# Altium PCB Copy of HumFlex2_1.PcbDoc
Units mm, origin at the board's own origin, x right, y up, seen from the top; angles counter-clockwise.
Board outline 87.02 x 100.02 mm, 2 copper layers (Top Layer, Bottom Layer), stack 0.187 mm thick; 35 components, 18 nets, 191 pads, 848 vias.
Unrouted connection lines stored in the file: 2.
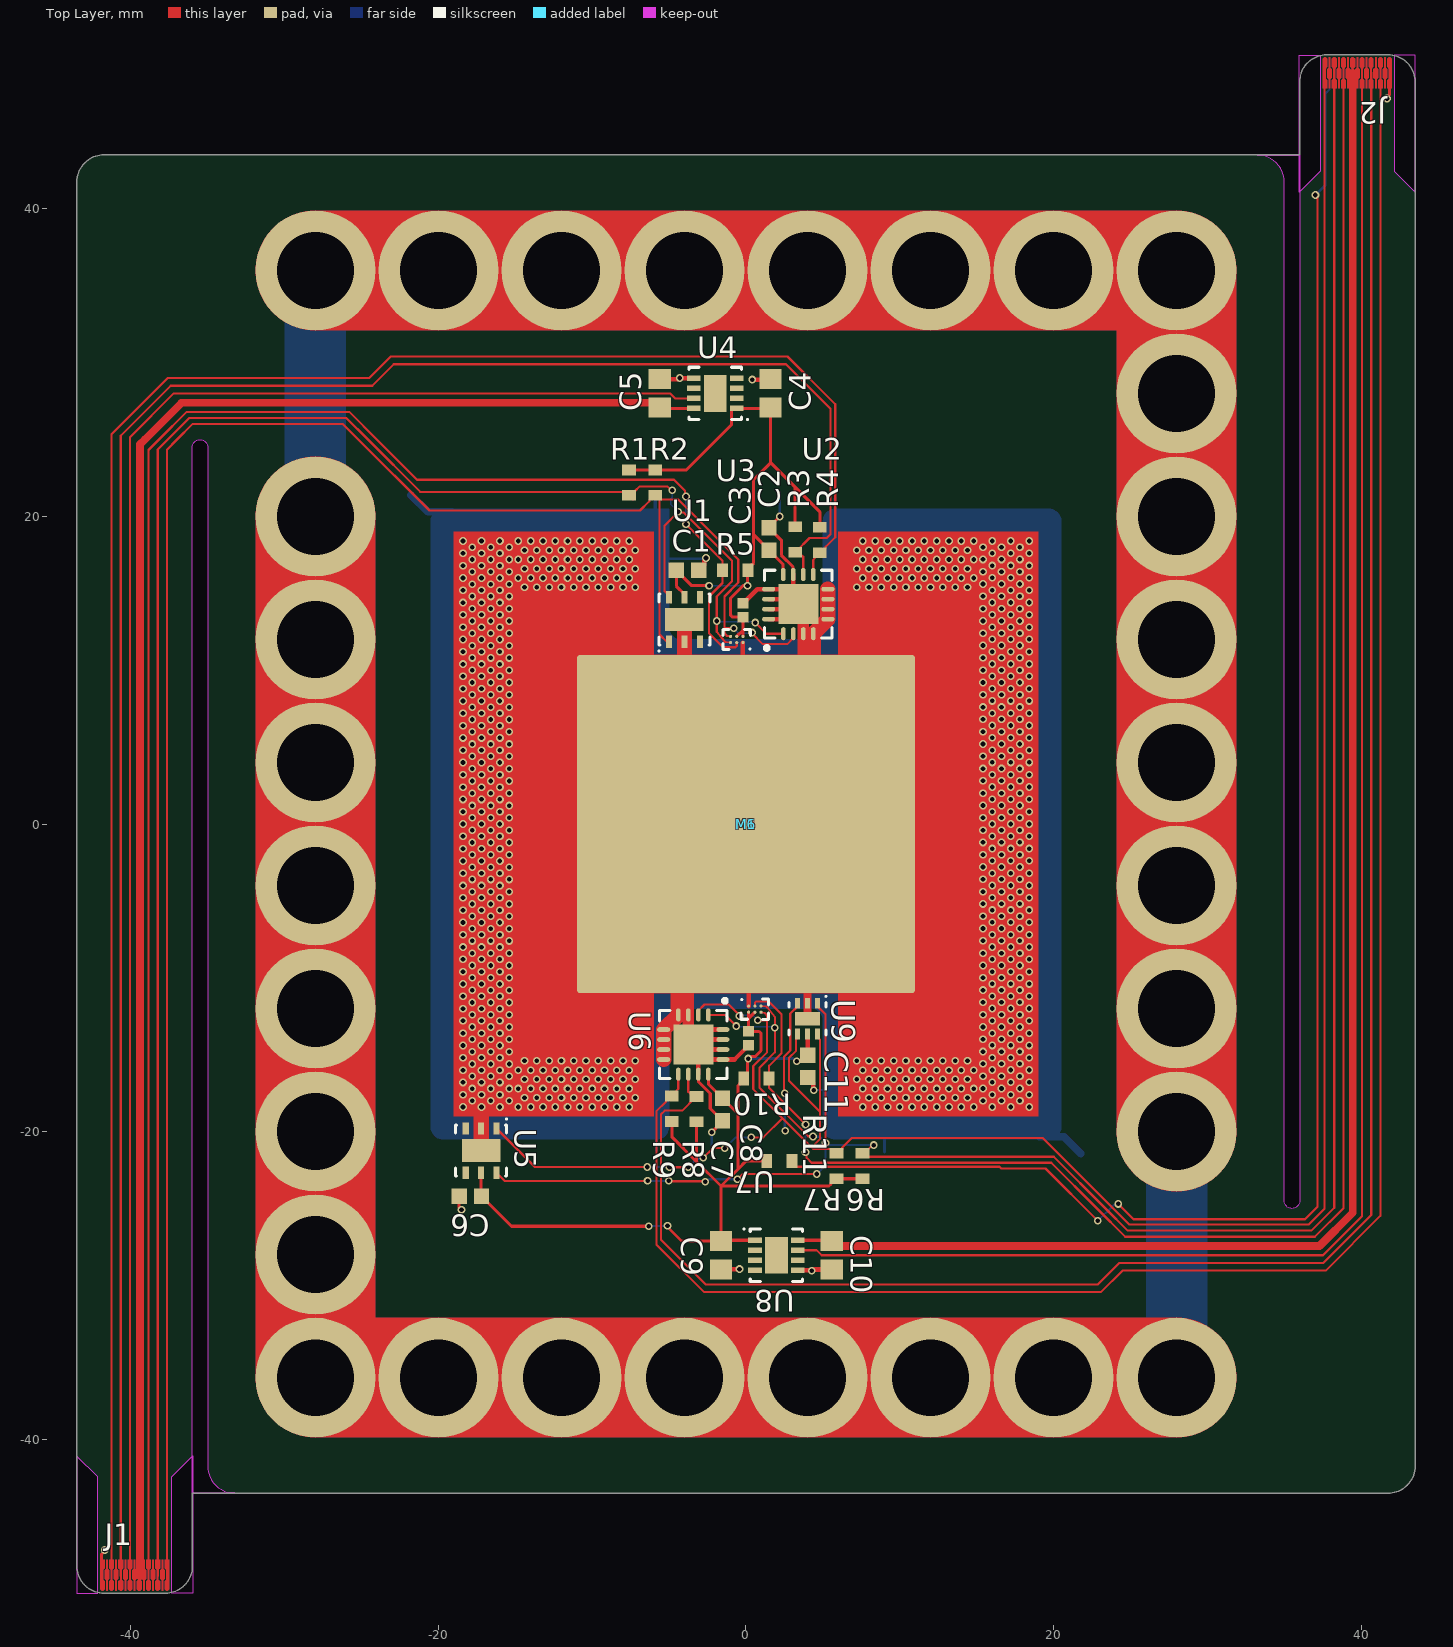
[diagram p0: Top Layer view]
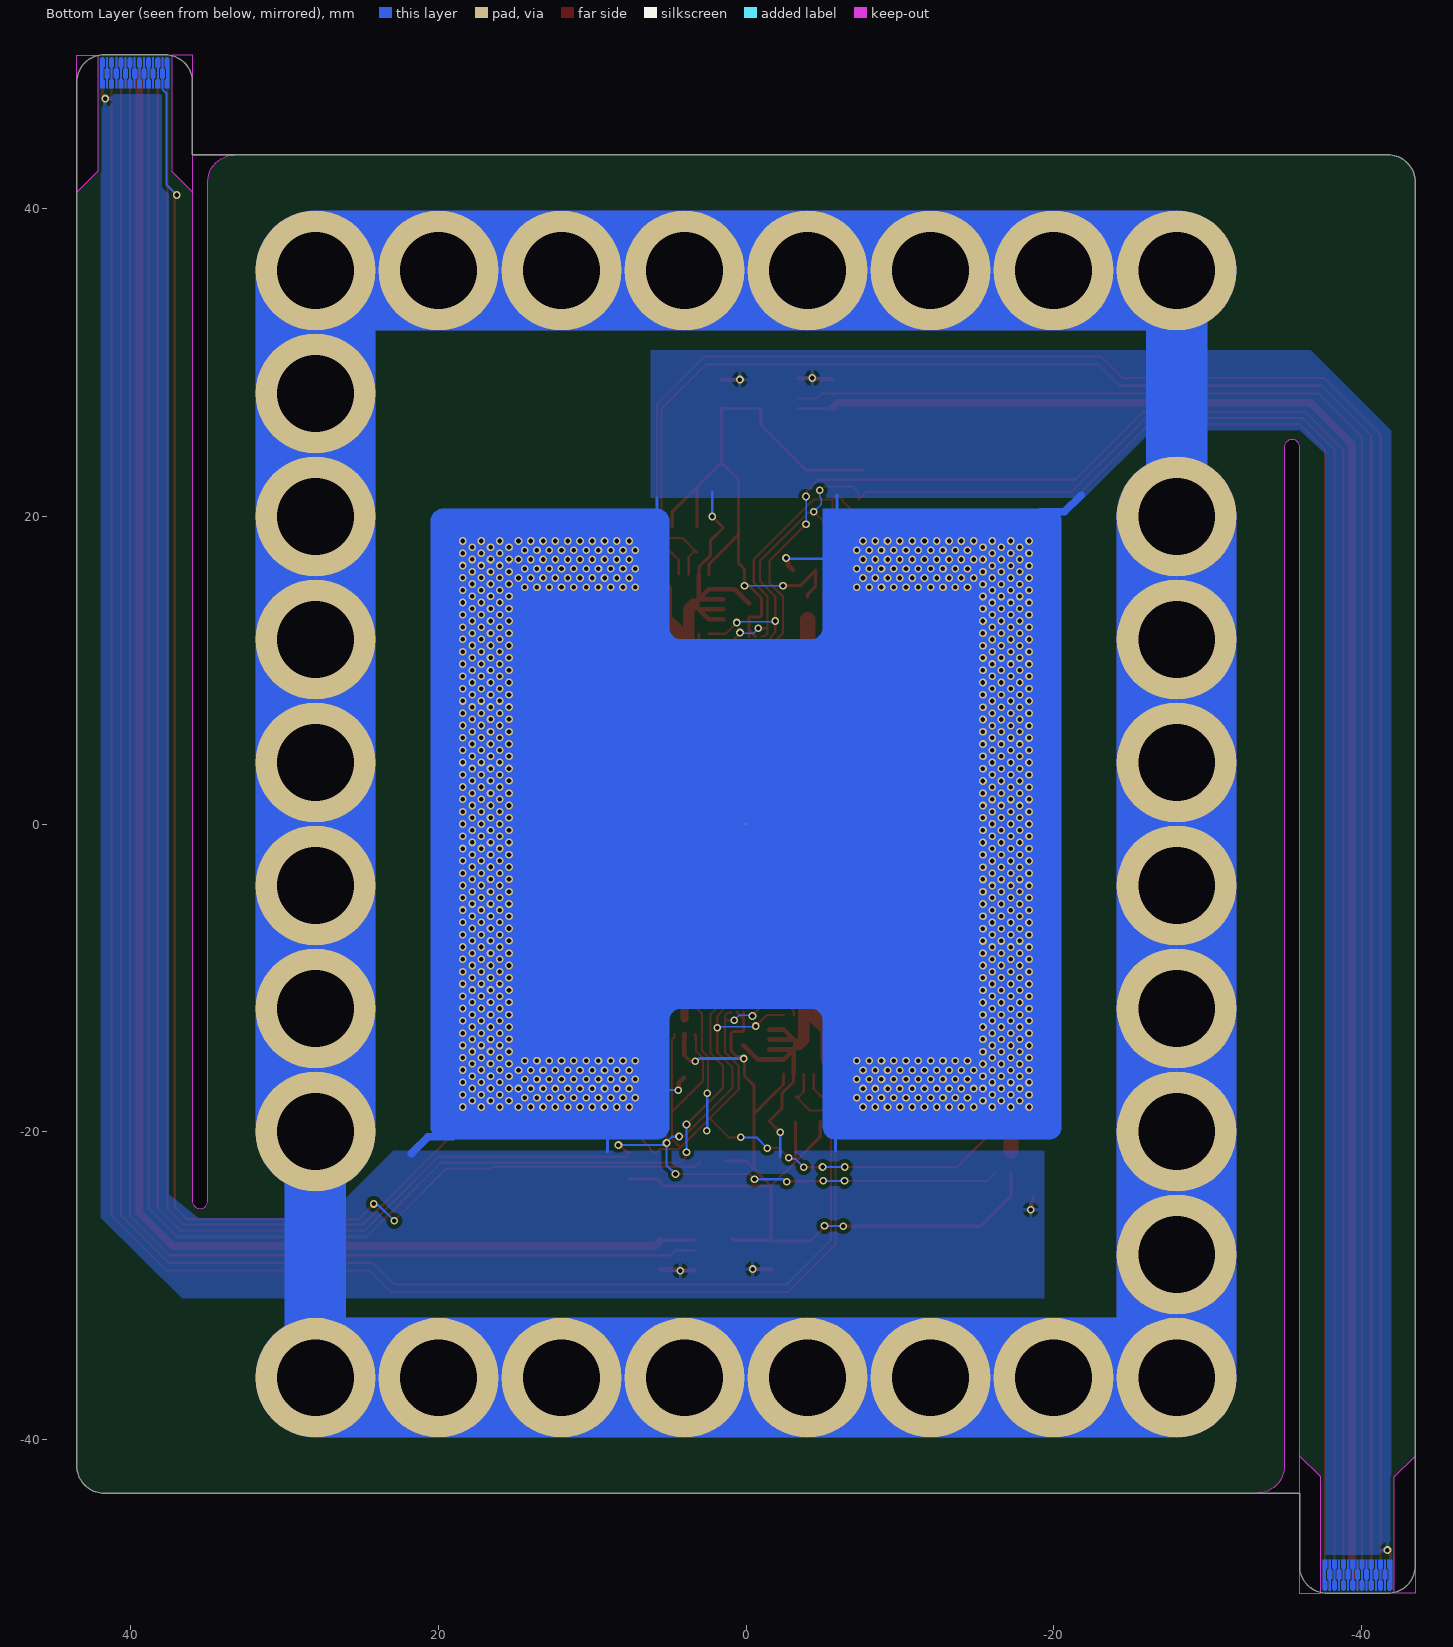
[diagram p1: Bottom Layer view, seen from below]

## Layer stack, top to bottom
Stiffener 1: core 0.1016, Core-009, Dk 4.5
Board Layer Stack Top Coverlay: solder mask 0.012, FC-001, Dk 4
Top Layer: signal copper 0.0175
Dielectric 1: core 0.0508, Core-001, Dk 4.1
Bottom Layer: signal copper 0.0175
Board Layer Stack Bottom Coverlay: solder mask 0.012, FC-001, Dk 4

## Board outline
42.996,-42.985 ccw(c41.753,-41.742) 43.511,-41.742 43.511,-24.994 43.511,48.253 ccw(c41.753,48.253) 41.753,50.011 37.758,50.011 ccw(c37.758,48.253) 36,48.253 36,43.511 -41.742,43.511 ccw(c-41.742,41.753) -42.991,42.99 ccw(c-41.747,41.747) -43.505,41.747 -43.505,25 -43.505,-48.247 ccw(c-41.747,-48.247) -41.747,-50.005 -37.753,-50.005 ccw(c-37.753,-48.247) -36.504,-49.485 ccw(c-37.747,-48.242) -35.989,-48.242 -35.989,-43.505 41.747,-43.505 ccw(c41.747,-41.747)
cut-out: -36,-43.5 -36,24.5 cw(c-35.5,24.5) -35.5,25 cw(c-35.5,24.5) -35,24.5 -35,-41.75 ccw(c-33.25,-41.75) -33.25,-43.5
cut-out: 35,-24.5 35,28 35,41.75 ccw(c33.25,41.75) 33.25,43.5 36,43.5 36,-24.5 cw(c35.5,-24.5) 35.5,-25 cw(c35.5,-24.5)
cut-out: 35.975,50 37.35,50 37.35,42.45 35.975,41.075
cut-out: 43.525,50 42.15,50 42.15,42.45 43.525,41.075
cut-out: -35.975,-50 -37.35,-50 -37.35,-42.45 -35.975,-41.075
cut-out: -43.5,-50 -42.15,-50 -42.15,-42.45 -43.5,-41.1
board region "Default Layer Stack Region": -43.5,-48.242 -43.5,-48.415 -43.432,-48.755 -43.3,-49.075 -43.108,-49.363 -42.863,-49.608 -42.575,-49.8 -42.255,-49.932 -41.915,-50 -41.742,-50 -37.747,-50 -37.574,-50 -37.234,-49.932 -36.915,-49.8 -36.627,-49.608 -36.382,-49.363 -36.189,-49.075 -36.057,-48.755 -35.989,-48.415 -35.989,-48.242 -35.989,-43.5 41.753,-43.5 41.926,-43.5 42.266,-43.432 42.585,-43.3 42.873,-43.108 43.118,-42.863 43.311,-42.575 43.443,-42.255 43.511,-41.915 43.511,-41.742 43.511,-24.994 43.511,48.253 43.511,48.426 43.443,48.766 43.311,49.085 43.118,49.373 42.873,49.618 42.585,49.811 42.266,49.943 41.926,50.011 41.753,50.011 37.758,50.011 37.585,50.011 37.245,49.943 36.925,49.811 36.637,49.618 36.392,49.373 36.2,49.085 36.068,48.766 36,48.426 36,48.253 36,43.511 -41.742,43.511 -41.912,43.511 -42.245,43.446 -42.559,43.319 -42.843,43.133 -43.087,42.897 -43.281,42.619 -43.418,42.309 -43.494,41.978 -43.499,41.808 -43.5,41.753 -43.5,25.006 -43.5,25.005
board region "Layer Stack Region 3": 41.747,-43.505 41.922,-43.505 42.263,-43.437 42.585,-43.303 42.874,-43.109 42.996,-42.985 42.868,-43.101 42.582,-43.292 42.263,-43.424 41.925,-43.492 41.753,-43.5 -35.989,-43.5 -35.989,-43.505
board region "Layer Stack Region 2": -43.5,24.995 -43.5,25.006 -43.5,41.753 -43.499,41.808 -43.486,41.972 -43.415,42.293 -43.285,42.595 -43.101,42.867 -42.991,42.99 -43.114,42.867 -43.306,42.579 -43.438,42.26 -43.505,41.92 -43.505,41.747 -43.505,25
board region "Layer Stack Region 5": -37.753,-50.005 -37.578,-50.005 -37.237,-49.937 -36.915,-49.803 -36.626,-49.609 -36.504,-49.485 -36.632,-49.601 -36.918,-49.792 -37.237,-49.924 -37.575,-49.992 -37.747,-50 -41.742,-50 -41.914,-49.992 -42.252,-49.924 -42.571,-49.792 -42.857,-49.601 -43.101,-49.357 -43.292,-49.071 -43.424,-48.752 -43.492,-48.414 -43.5,-48.242 -43.5,24.995 -43.505,25 -43.505,-48.247 -43.505,-48.421 -43.438,-48.76 -43.305,-49.08 -43.113,-49.368 -42.868,-49.613 -42.58,-49.805 -42.26,-49.938 -41.921,-50.005 -41.747,-50.005

## Design rules (kind name [scope] priority, off if disabled: settings)
Clearance [All] p1: gap=0.08 ignorepadtopadclearanceinfootprint=FALSE
ComponentClearance ComponentClearance_1 [InComponent('M6')] p1: gap=0 collisioncheckmode=3 verticalgap=0 showdistances=FALSE donotcheckwithout3dbody=TRUE
ComponentClearance ComponentClearance_2 [InComponent('M1')] p2: gap=0 collisioncheckmode=3 verticalgap=0 showdistances=FALSE donotcheckwithout3dbody=TRUE
ComponentClearance [All] p3: gap=0.254 collisioncheckmode=3 verticalgap=0.254 showdistances=FALSE
HoleSize [All] p1: absolutevalues=TRUE maxlimit=6 minlimit=0.2 maxpercent=80.000 minpercent=20.000
HoleToHoleClearance [All] p1: gap=0.3 allowstackedmicrovias=TRUE
MinimumAnnularRing [All] p1: minimumring=0.1
MinimumSolderMaskSliver [HasFootprint('PeltierElement')] p1: minsoldermaskwidth=0
MinimumSolderMaskSliver MinimumSolderMaskSliver_1 [All] p2: minsoldermaskwidth=0
PolygonConnect [All] p1: connectstyle=Relief reliefconductorwidth=0.254 reliefentries=4 polygonreliefangle="90 Angle" airgapwidth=0.254
RoutingVias [All] p1: holewidth=0.711 width=1.27 viastyle="Through Hole" minholewidth=0.711 minwidth=1.27 maxholewidth=0.711 maxwidth=1.27
SilkToSilkClearance [All] p1: silktosilkclearance=0.15
SilkToSolderMaskClearance [IsPad] p1: minsilkscreentomaskgap=0.15 clearancetoexposedcopper=TRUE
SolderMaskExpansion [All] p1: expansion=0.1 istentingtop=FALSE
Width [All] p1: maxlimit=8 minlimit=0.08 preferedwidth=0.2
24 further rules are at their usual default settings.

## Classes and differential pairs
component class HumFlex2_upper: C1 C2 C3 C4 C5 J1 R1 R2 R3 R4 R5 U1 U2 U3 U4
component class HumFlex2_mech: M1 M6
component class HumFlex2_lower: C6 C7 C8 C9 C10 C11 J2 R6 R7 R8 R9 R10 R11 U5 U6 U7 U8 U9

## Components (designator, comment, footprint, x,y, rotation, side; value= is the part's Value field where it differs from the comment)
C1 "100nF" CAP_SM0603_YAGEOCC2_N -3.8,16.5 r180 top
C2 "100nF" CAP_SM0603_YAGEOCC2_N 1.5,18.527 r270 top
C3 "10nF" CAP_SM0402_YAGEOCC2_N -0.2,13.9 r90 top
C4 "1uF" CAP_SM0805_YAGEOCC2_N 1.6,28 r270 top
C5 "1uF" CAP_SM0805_YAGEOCC2_N -5.6,28 r270 top
C6 "100nF" CAP_SM0603_YAGEOCC2_N -17.927,-24.2 r0 top
C7 "100nF" CAP_SM0603_YAGEOCC2_N -1.525,-18.564 r90 top
C8 "10nF" CAP_SM0402_YAGEOCC2_N 0.175,-13.937 r270 top
C9 "1uF" CAP_SM0805_YAGEOCC2_N -1.625,-28.037 r90 top
C10 "1uF" CAP_SM0805_YAGEOCC2_N 5.575,-28.037 r90 top
C11 "100nF" CAP_SM0603_YAGEOCC2_N 4.025,-15.75 r90 top
J1 "Dual Row 15Pos Connector" AYF331535_FPC -37.65,-49.85 r180 top
J2 "Dual Row 15Pos Connector" AYF331535_FPC 37.65,49.85 r0 top
M1 "Peltier Element" PeltierElement2 0,0 r90 top locked
M6 "Lego_Mount" Lego_Mount 0,0 r0 top
R1 "10K" RES_SM0603_YAGEORC_N -7.6,22.2 r90 top
R2 "10K" RES_SM0603_YAGEORC_N -5.9,22.2 r90 top
R3 "10K" RES_SM0603_YAGEORC_N 3.2,18.5 r90 top
R4 "10K" RES_SM0603_YAGEORC_N 4.8,18.473 r90 top
R5 "10K" RES_SM0603_YAGEORC_N -0.7,16.5 r0 top
R6 "10K" RES_SM0603_YAGEORC_N 7.575,-22.237 r270 top
R7 "10K" RES_SM0603_YAGEORC_N 5.875,-22.237 r270 top
R8 "10K" RES_SM0603_YAGEORC_N -3.225,-18.537 r270 top
R9 "10K" RES_SM0603_YAGEORC_N -4.825,-18.51 r270 top
R10 "10K" RES_SM0603_YAGEORC_N 0.675,-16.537 r180 top
R11 "10K" RES_SM0603_YAGEORC_N 2.173,-21.9 r180 top
U1 "SI7051-A20-IMR" SI7050/1/2/3/4/5 -4,13.3 r90 top
U2 "ADT7422CCPZ-RL7" ADT7422_QFN 3.4,14.3 r90 top
U3 "AS6221" AS6221_BGA -0.6,12 r180 top
U4 "TPS78433" TPS784xxxQDRBRQ1_SON -2,28 r180 top
U5 "SI7051-A20-IMR" SI7050/1/2/3/4/5 -17.225,-21.235 r270 top
U6 "ADT7422CCPZ-RL7" ADT7422_QFN -3.425,-14.337 r270 top
U7 "AS6221" AS6221_BGA 0.575,-12.037 r0 top
U8 "TPS78433" TPS784xxxQDRBRQ1_SON 1.975,-28.037 r0 top
U9 "TMP117" TMP117(N/M)AIDRV_WSON 4,-12.65 r270 top

## Footprints (in the part's own frame and the unit in brackets; to place one, negate y for a bottom-side part, rotate by r counter-clockwise, add the part's x,y. Pads: shape width x height; smd on the part's side, far side on the other; paste and mask are expansions set on the pad)
ADT7422_QFN [mm] "QFN, 16-Leads, Body 4,00x4,00mm, Pitch 0,65mm, Thermal Pad 2,60x2,60mm, IPC Medium Density"
  oval 0.85x0.3 smd: 1(-1.925,0.975) 2(-1.925,0.325) 3(-1.925,-0.325) 4(-1.925,-0.975) 9(1.925,-0.975) 10(1.925,-0.325) 11(1.925,0.325) 12(1.925,0.975)
  oval 0.3x0.85 smd: 5(-0.975,-1.925) 6(-0.325,-1.925) 7(0.325,-1.925) 8(0.975,-1.925) 13(0.975,1.925) 14(0.325,1.925) 15(-0.325,1.925) 16(-0.975,1.925)
  rect 2.6x2.6 smd: 17(0,0)
  silkscreen extent -2.97,-2.2 2.2,2.2, body extent -2.05,-2.05 2.05,2.05, height 0.8
AS6221_BGA [mm] "BGA, 6-Leads, Body 1,02x1,50mmx0,53mm, Pitch 0,40mm"
  round 0.2 smd: A1(-0.4,0.2) A2(0,0.2) A3(0.4,0.2) B1(-0.4,-0.2) B2(0,-0.2) B3(0.4,-0.2)
  silkscreen extent -0.9,-0.66 0.89,0.66, body extent -0.74,-0.51 0.74,0.51, height 0.55
AYF331535_FPC [mil]
  round 1 all layers, no hole paste-99999 mask+3.94: 1(0,-39.37) 2(11.81,-39.37)
  round 1 all layers, no hole paste-99999: 3(23.62,-39.37) 4(35.43,-39.37) 5(47.24,-39.37) 6(59.06,-39.37) 7(70.87,-39.37) 8(82.68,-39.37) 9(94.49,-39.37) 10(106.3,-39.37) 11(118.11,-39.37) 12(129.92,-39.37) 13(141.73,-39.37) 14(153.54,-39.37) 15(165.35,-39.37)
  Top Layer region: -5.91,-78.74 -5.91,-3.94 -1.97,0 -1.97,0 1.97,0 5.91,-3.94 5.91,-24.61 1.97,-28.54 1.97,-54.13 5.91,-58.07 5.91,-78.74
  Top Layer region: 5.91,-52.17 5.91,-30.51 9.84,-26.57 9.84,0 13.78,0 13.78,-26.57 17.72,-30.51 17.72,-52.17 13.78,-56.1 13.78,-78.74 9.84,-78.74 9.84,-56.1
  Top Layer region: 17.72,-78.74 17.72,-58.07 21.65,-54.13 21.65,-28.54 17.72,-24.61 17.72,-3.94 21.65,0 25.59,0 29.53,-3.94 29.53,-24.61 25.59,-28.54 25.59,-54.13 29.53,-58.07 29.53,-78.74
  Top Layer region: 29.53,-52.17 29.53,-30.51 33.46,-26.57 33.46,0 37.4,0 37.4,-26.57 41.34,-30.51 41.34,-52.17 37.4,-56.1 37.4,-78.74 33.46,-78.74 33.46,-56.1
  Top Layer region: 41.34,-78.74 41.34,-58.07 45.28,-54.13 45.28,-28.54 41.34,-24.61 41.34,-3.94 45.28,0 49.21,0 53.15,-3.94 53.15,-24.61 49.21,-28.54 49.21,-54.13 53.15,-58.07 53.15,-78.74
  Top Layer region: 64.96,-78.74 64.96,-58.07 68.9,-54.13 68.9,-28.54 64.96,-24.61 64.96,-3.94 68.9,0 72.83,0 76.77,-3.94 76.77,-24.61 72.83,-28.54 72.83,-54.13 76.77,-58.07 76.77,-78.74
  Top Layer region: 53.15,-52.17 53.15,-30.51 57.09,-26.57 57.09,0 61.02,0 61.02,-26.57 64.96,-30.51 64.96,-52.17 61.02,-56.1 61.02,-78.74 57.09,-78.74 57.09,-56.1
  Top Layer region: 76.77,-52.17 76.77,-30.51 80.71,-26.57 80.71,0 84.65,0 84.65,-26.57 88.58,-30.51 88.58,-52.17 84.65,-56.1 84.65,-78.74 80.71,-78.74 80.71,-56.1
  Top Layer region: 88.58,-78.74 88.58,-58.07 92.52,-54.13 92.52,-28.54 88.58,-24.61 88.58,-3.94 92.52,0 96.46,0 100.39,-3.94 100.39,-24.61 96.46,-28.54 96.46,-54.13 100.39,-58.07 100.39,-78.74
  Top Layer region: 100.39,-52.17 100.39,-30.51 104.33,-26.57 104.33,0 108.27,0 108.27,-26.57 112.2,-30.51 112.2,-52.17 108.27,-56.1 108.27,-78.74 104.33,-78.74 104.33,-56.1
  Top Layer region: 112.2,-78.74 112.2,-58.07 116.14,-54.13 116.14,-28.54 112.2,-24.61 112.2,-3.94 116.14,0 120.08,0 124.02,-3.94 124.02,-24.61 120.08,-28.54 120.08,-54.13 124.02,-58.07 124.02,-78.74
  Top Layer region: 124.02,-52.17 124.02,-30.51 127.95,-26.57 127.95,0 131.89,0 131.89,-26.57 135.83,-30.51 135.83,-52.17 131.89,-56.1 131.89,-78.74 127.95,-78.74 127.95,-56.1
  Top Layer region: 135.83,-78.74 135.83,-58.07 139.76,-54.13 139.76,-28.54 135.83,-24.61 135.83,-3.94 139.76,0 143.7,0 147.64,-3.94 147.64,-24.61 143.7,-28.54 143.7,-54.13 147.64,-58.07 147.64,-78.74
  Top Layer region: 147.64,-52.17 147.64,-30.51 151.57,-26.57 151.57,0 155.51,0 155.51,-26.57 159.45,-30.51 159.45,-52.17 155.51,-56.1 155.51,-78.74 151.57,-78.74 151.57,-56.1
  Top Layer region: 159.45,-78.74 159.45,-58.07 163.39,-54.13 163.39,-54.13 163.39,-28.54 159.45,-24.61 159.45,-24.61 159.45,-3.94 163.39,0 167.32,0 171.26,-3.94 171.26,-78.74
  Bottom Layer region: -5.91,-78.74 -5.91,-3.94 -1.97,0 -1.97,0 1.97,0 5.91,-3.94 5.91,-24.61 1.97,-28.54 1.97,-54.13 5.91,-58.07 5.91,-78.74
  Bottom Layer region: 5.91,-52.17 5.91,-30.51 9.84,-26.57 9.84,0 13.78,0 13.78,-26.57 17.72,-30.51 17.72,-52.17 13.78,-56.1 13.78,-78.74 9.84,-78.74 9.84,-56.1
  Bottom Layer region: 17.72,-78.74 17.72,-58.07 21.65,-54.13 21.65,-28.54 17.72,-24.61 17.72,-3.94 21.65,0 25.59,0 29.53,-3.94 29.53,-24.61 25.59,-28.54 25.59,-54.13 29.53,-58.07 29.53,-78.74
  Bottom Layer region: 29.53,-52.17 29.53,-30.51 33.46,-26.57 33.46,0 37.4,0 37.4,-26.57 41.34,-30.51 41.34,-52.17 37.4,-56.1 37.4,-78.74 33.46,-78.74 33.46,-56.1
  Bottom Layer region: 41.34,-78.74 41.34,-58.07 45.28,-54.13 45.28,-28.54 41.34,-24.61 41.34,-3.94 45.28,0 49.21,0 53.15,-3.94 53.15,-24.61 49.21,-28.54 49.21,-54.13 53.15,-58.07 53.15,-78.74
  Bottom Layer region: 64.96,-78.74 64.96,-58.07 68.9,-54.13 68.9,-28.54 64.96,-24.61 64.96,-3.94 68.9,0 72.83,0 76.77,-3.94 76.77,-24.61 72.83,-28.54 72.83,-54.13 76.77,-58.07 76.77,-78.74
  Bottom Layer region: 53.15,-52.17 53.15,-30.51 57.09,-26.57 57.09,0 61.02,0 61.02,-26.57 64.96,-30.51 64.96,-52.17 61.02,-56.1 61.02,-78.74 57.09,-78.74 57.09,-56.1
  Bottom Layer region: 76.77,-52.17 76.77,-30.51 80.71,-26.57 80.71,0 84.65,0 84.65,-26.57 88.58,-30.51 88.58,-52.17 84.65,-56.1 84.65,-78.74 80.71,-78.74 80.71,-56.1
  Bottom Layer region: 88.58,-78.74 88.58,-58.07 92.52,-54.13 92.52,-28.54 88.58,-24.61 88.58,-3.94 92.52,0 96.46,0 100.39,-3.94 100.39,-24.61 96.46,-28.54 96.46,-54.13 100.39,-58.07 100.39,-78.74
  Bottom Layer region: 100.39,-52.17 100.39,-30.51 104.33,-26.57 104.33,0 108.27,0 108.27,-26.57 112.2,-30.51 112.2,-52.17 108.27,-56.1 108.27,-78.74 104.33,-78.74 104.33,-56.1
  Bottom Layer region: 112.2,-78.74 112.2,-58.07 116.14,-54.13 116.14,-28.54 112.2,-24.61 112.2,-3.94 116.14,0 120.08,0 124.02,-3.94 124.02,-24.61 120.08,-28.54 120.08,-54.13 124.02,-58.07 124.02,-78.74
  Bottom Layer region: 124.02,-52.17 124.02,-30.51 127.95,-26.57 127.95,0 131.89,0 131.89,-26.57 135.83,-30.51 135.83,-52.17 131.89,-56.1 131.89,-78.74 127.95,-78.74 127.95,-56.1
  Bottom Layer region: 135.83,-78.74 135.83,-58.07 139.76,-54.13 139.76,-28.54 135.83,-24.61 135.83,-3.94 139.76,0 143.7,0 147.64,-3.94 147.64,-24.61 143.7,-28.54 143.7,-54.13 147.64,-58.07 147.64,-78.74
  Bottom Layer region: 147.64,-52.17 147.64,-30.51 151.57,-26.57 151.57,0 155.51,0 155.51,-26.57 159.45,-30.51 159.45,-52.17 155.51,-56.1 155.51,-78.74 151.57,-78.74 151.57,-56.1
  Bottom Layer region: 159.45,-78.74 159.45,-58.07 163.39,-54.13 163.39,-54.13 163.39,-28.54 159.45,-24.61 159.45,-24.61 159.45,-3.94 163.39,0 167.32,0 171.26,-3.94 171.26,-78.74
CAP_SM0402_YAGEOCC2_N [mm] "Capacitor, Yageo CC Class2, SM0402, IPC Medium Density"
  rect 0.68x0.72 smd: 1(-0.45,0) 2(0.45,0)
  body extent -0.55,-0.35 0.55,0.35, height 0.6
CAP_SM0603_YAGEOCC2_N [mm] "Capacitor, Yageo CC Class2, SM0603, IPC Medium Density"
  rect 1x1 smd: 1(-0.727,0) 2(0.727,0)
  body extent -0.9,-0.5 0.9,0.5, height 0.9
CAP_SM0805_YAGEOCC2_N [mm] "Capacitor, Yageo CC Class2, SM0805, IPC Medium Density"
  rect 1.3x1.45 smd: 1(-0.927,0) 2(0.927,0)
  body extent -1.1,-0.72 1.1,0.72, height 1.45
Lego_Mount [mm]
  round 7.8 hole 5: 1(-28,-36) 1(-28,-28) 1(-28,-20) 1(-28,-12) 1(-28,-4) 1(-28,4) 1(-28,12) 1(-28,20) 1(-28,36) 1(-20,-36) 1(-20,36) 1(-12,-36) 1(-12,36) 1(-4,-36) 1(-4,36) 1(4,-36) 1(4,36) 1(12,-36) 1(12,36) 1(20,-36) 1(20,36) 1(28,-36) 1(28,-20) 1(28,-12) 1(28,-4) 1(28,4) 1(28,12) 1(28,20) 1(28,28) 1(28,36)
  Top Layer lines w7.8: -28,20 -28,-36 28,-36 ; -28,36 28,36 28,-20
  Bottom Layer lines w7.8: -28,20 -28,-36 28,-36 ; -28,36 28,36 28,-20
PeltierElement2 [mm]
  rrect2% 22x22 smd paste-2539.97: 1(0,0)
  round 0.025 smd far side paste-2539.97: 1(0,0)
  Top Layer region: -19,19 -19,6 -11,6 -11,-6 -19,-6 -19,-19 19,-19 19,-6 11,-6 11,6 19,6 19,19
  Bottom Layer region: -20.5,-19.713 -20.5,-5.787 -20.44,-5.486 -20.269,-5.231 -20.014,-5.06 -19.713,-5 -19.713,-5 -12.787,-5 -12.486,-4.94 -12.231,-4.769 -12.06,-4.514 -12,-4.213 -12,-4.213 -12,4.213 -12.06,4.514 -12.231,4.769 -12.486,4.94 -12.787,5 -12.787,5 -19.713,5 -20.014,5.06 -20.269,5.231 -20.44,5.486 -20.5,5.787 -20.5,5.787 -20.5,19.713 -20.44,20.014 -20.269,20.269 -20.014,20.44 -19.713,20.5 -19.713,20.5 19.713,20.5 20.014,20.44 20.269,20.269 20.44,20.014 20.5,19.713 20.5,19.713 20.5,5 12.787,5 12.486,4.94 12.231,4.769 12.06,4.514 12,4.213 12,4.213 12,-4.213 12.06,-4.514 12.231,-4.769 12.486,-4.94 12.787,-5 12.787,-5 19.713,-5 20.014,-5.06 20.269,-5.231 20.44,-5.486 20.5,-5.787 20.5,-5.787 20.5,-19.713 20.44,-20.014 20.269,-20.269 20.014,-20.44 19.713,-20.5 19.713,-20.5 -19.713,-20.5 -20.014,-20.44 -20.269,-20.269 -20.44,-20.014 -20.5,-19.713
  body extent -20,-20 20,20, height 8
RES_SM0603_YAGEORC_N [mm] "Resistor, Yageo RC_L, SM0603, IPC Medium Density"
  rect 0.7x0.9 smd: 1(-0.827,0) 2(0.827,0)
  body extent -0.85,-0.45 0.85,0.45, height 0.55
SI7050/1/2/3/4/5 [mm] "SON, 6-Leads, Body 3,00x3,00mm, Pitch 1,00mm, Thermal Pad 2,50x1,50mm, IPC Medium Density"
  rect 0.8x0.4 smd: 1(-1.44,1) 2(-1.44,0) 3(-1.44,-1) 4(1.44,-1) 5(1.44,0) 6(1.44,1)
  rect 1.5x2.5 smd: 7(0,0)
  silkscreen extent -2.1,-1.65 1.65,1.7, body extent -1.5,-1.5 1.5,1.5, height 0.8
TMP117(N/M)AIDRV_WSON [mm] "SON127P600-8N"
  rect 0.7x0.3 smd: 1(-0.995,0.65) 2(-0.995,0) 3(-0.995,-0.65) 4(0.995,-0.65) 5(0.995,0) 6(0.995,0.65)
  rect 0.89x1.6 smd: 7(0,0)
  silkscreen extent -1.5,-1.2 1.05,1.25, body extent -1.05,-1.05 1.05,1.05, height 0.8
TPS784xxxQDRBRQ1_SON [mm] "SON127P600-8N"
  rect 0.9x0.35 smd: 1(-1.395,0.975) 2(-1.395,0.325) 3(-1.395,-0.325) 4(-1.395,-0.975) 5(1.395,-0.975) 6(1.395,-0.325) 7(1.395,0.325) 8(1.395,0.975)
  rect 1.49x2.4 smd: 9(0,0)
  silkscreen extent -2.15,-1.7 1.7,1.75, body extent -1.55,-1.55 1.55,1.55, height 1

## Part data
C1 C2 C6 C7 C11: library part CC0603KRX7R9BB104, "CAP 100nF SM0603 X7R 50V YAGEO CC2", Manufacturer=Yageo, Package=0603, Supplier Part Number 1=1362556, Tolerance (%)=10, Voltage Rating (Volts)=50, Category=Capacitor, ComponentLink1Description="Manufacturer Website", ComponentLink1URL=http://www.yageo.com, Manufacturer Part Number=CC0603KRX7R9BB104, Supplier 1=Farnell, Supplier 2=Digi-Key, Supplier Part Number 2=311-1344-1-ND
C3 C8: library part CC0402KRX7R9BB103, "CAP 10nF SM0402 X7R 50V YAGEO CC2", Manufacturer=Yageo, Manufacturer Part Number=CC0603KRX7R9BB103, Package=0603, Supplier Part Number 1=3369167, Tolerance (%)=10, Voltage Rating (Volts)=50, Category=Capacitor, ComponentLink1Description="Manufacturer Website", ComponentLink1URL=http://www.yageo.com, Supplier 1=Farnell, Supplier 2=Mouser, Supplier 3=Digi-Key, Supplier Part Number 2=603-CC402KRX7R9BB103, Supplier Part Number 3=311-1349-1-ND
C4 C5 C9 C10: library part CC0805KKX7R8BB105, "CAP 1uF SM0805 X7R 25V YAGEO CC2", Manufacturer=Yageo, Package=0805, Supplier Part Number 1=1458903, Tolerance (%)=10, Voltage Rating (Volts)=25, Category=Capacitor, ComponentLink1Description="Manufacturer Website", ComponentLink1URL=http://www.yageo.com, Manufacturer Part Number=CC0805KKX7R8BB105, Supplier 1=Farnell, Supplier 2=Digi-Key, Supplier Part Number 2=311-1456-1-ND
J1 J2: library part Connector_15_DualRow
M1: library part PeltierElement, "Peltier element 40mm x 40mm"
R1 R2 R3 R4 R5 R6 R7 R8 R9 R10 R11: library part RC0603FR-0710KL, "RES 10K SM0603 YAGEO RC_L", Manufacturer=Yageo, Package=0603, Power (Watts)=0.1, Resistance (Ohms)=10000, Supplier Part Number 1=9238603, Tolerance (%)=1, Category=Resistor, ComponentLink1Description="Manufacturer Website", ComponentLink1URL=http://www.yageo.com, Manufacturer Part Number=RC0603FR-0710KL, Supplier 1=Farnell, Supplier 2=Digi-Key, Supplier Part Number 2=311-10.0KHRCT-ND
U1 U5: "Si7051-A20 Temperature Sensor ±0.1°C maximum accuracy, Digital I2C, -40°C ~ 125°C 14b 6-DFN (3x3)", Supplier Part Number 1=3265013RL, Supplier 1=Farnell, Supplier 2=Mouser, Supplier 3=Digi-Key, Supplier Part Number 2=634-SI7051-A20-IMR, Supplier Part Number 3=336-4764-1-ND
U2 U6: "ADT7422 Temperature Sensor, ±0.1°C Accuracy, 16b, Digital I2C /  -40°C bis 125°C 16-LFCSP-WQ (4x4)", Supplier Part Number 1=584-ADT7422CCPZ-RL7, Supplier 1=Mouser, Supplier 2=Digi-Key, Supplier Part Number 2=505-ADT7422CCPZ-RL7CT-ND
U3 U7: library part AS6221-AWLT-S, "AS6221 Temperature Sensor Digital -40°C ~ 125°C 16b 6-WLCSP (1.5x1.03)", Supplier Part Number 1=985-AS6221-AWLT-S, Supplier 1=Mouser, Supplier 2=Digi-Key, Supplier Part Number 2=4991-AS6221-AWLT-SCT-ND
U4 U8: library part TPS78433QWDRBRQ1, "TPS78433-Q1 3.3V, 300-mA, High-PSRR Low-Dropout Voltage Regulator With High Accuracy and Enable,  8-SON (3x3)", Supplier Part Number 1=595-TPS78433QWDRBRQ1, Supplier 1=Mouser, Supplier 2=Digi-Key, Supplier Part Number 2=296-TPS78433QWDRBRQ1CT-ND
U9: library part TMP117NAIDRVR, "TMP117 High-Accuracy, Low-Power, Digital Temperature Sensor, -55°C bis 150°C, 16b 6-WSON (2x2)"

## Via types
v1: diameter 0.5, hole 0.3, Top Layer to Bottom Layer, tented top, 798 vias
v2: diameter 0.5, hole 0.3, Top Layer to Bottom Layer, tented both sides, 47 vias
v3: diameter 0.5, hole 0.3, Top Layer to Bottom Layer, 3 vias

## Nets (pads, with @x,y where several pads share a name; then routed paths per layer and width w, separated by ;. In a path a pad name is that pad's centre, name@x,y a point inside that pad or via, vN(x,y) a via of type N, cw(c..) or ccw(c..) an arc to the next point about the centre after c; other vN are vias at no path point)
3V: C1.2 C2.2 C3.1 C4.2 R1.2 R2.2 R3.2 R4.2 R5.2 U1.5 U2.12 U3.B1 U3.B2 U4.1 | length 47.4
  Top Layer w0.2: R1.2 R2.2 -3.873,23.027 -0.955,25.945 -0.955,26.95 -0.88,27.025 U4.1 1.552,27.025 C4.2 1.6,23.5 ; U1.5 -4,14.94 -4.527,15.467 C1.2 -3.527,15.5 v2(-2.4,15.5) ; U3.B2 -0.2,12.6 ; U3.B1 -0.2,12.6 ; U2.12 2.406,16.244 2.406,16.894 C2.2 0.5,18.8 ; R3.2 3.2,21.9 ; R4.2 4.8,20.3 3.2,21.9 ; -0.2,12.6 C3.1 -0.883,13.45 -1,13.567 -1,14.7 -0.2,15.5 v2(0.1,15.5) 0.1,16.573 0.377,16.85 0.383,16.85 0.5,16.967 0.5,18.8 ; 0.5,18.8 0.5,22.4 1.6,23.5 ; 1.6,23.5 3.2,21.9
  Bottom Layer w0.1: v2(-2.4,15.5) v2(0.1,15.5)
3V_B: C6.2 C7.2 C8.1 C9.2 C11.2 R6.2 R7.2 R8.2 R9.2 R10.2 R11.2 U5.5 U6.12 U7.B1 U7.B2 U8.1 U9.5 | length 66.9
  Top Layer w0.2: U5.5 -17.225,-24.175 C6.2 -15.25,-26.15 v2(-6.325,-26.15) ; v2(-5.1,-26.125) -5.1,-26.2 -4.19,-27.11 C9.2 ; R9.2 -4.825,-20.337 -3.225,-21.937 ; R8.2 -3.225,-21.937 ; U6.12 -2.43,-16.281 -2.43,-16.931 C7.2 -0.525,-18.837 ; U7.B1 0.175,-12.637 ; U7.B2 0.175,-12.637 ; U8.1@0.93,-26.987 0.855,-27.062 U8.1 -1.577,-27.062 C9.2 ; R11.2 0.012,-21.9 -0.525,-22.437 ; v2(3.3,-15.425) 3.302,-15.423 3.625,-15.423 C11.2 ; R6.2 5.775,-23.064 5.525,-23.314 5.525,-23.414 5.402,-23.537 -1.625,-23.537 ; -3.225,-21.937 -1.625,-23.537 ; C9.2 -1.625,-23.537 ; -1.625,-23.537 -0.525,-22.437 ; -0.525,-22.437 -0.525,-18.837 ; -0.525,-18.837 -0.525,-17.004 -0.407,-16.887 -0.402,-16.887 0.098,-16.387 0.098,-15.302 v2(0.15,-15.25) 0.231,-15.25 0.36,-15.121 0.591,-15.121 0.975,-14.737 0.975,-13.604 0.858,-13.487 C8.1 0.175,-12.637
  Top Layer w0.3: U9.5 4,-13.845 4.025,-13.87 C11.2
  Bottom Layer w0.14: v2(-6.325,-26.15) -6.312,-26.137 -5.112,-26.137 v2(-5.1,-26.125)
  Bottom Layer w0.2: v2(0.15,-15.25) 3.044,-15.25 3.219,-15.425 v2(3.3,-15.425)
GND: C1.1 C2.1 C3.2 C4.1 C5.1 C6.1 C7.1 C8.2 C9.1 C10.1 C11.1 J1.15 J2.15 M1.1 M6.1 U1.2 U1.7 U2.3 U2.4 U2.5 U2.6 U2.7 U2.8 U2.11 U2.13 U2.14 U2.15 U2.16 U2.17 U3.A1 U4.5 U5.2 U5.7 U6.3 U6.4 U6.5 U6.6 U6.7 U6.8 U6.11 U6.13 U6.14 U6.15 U6.16 U6.17 U7.A1 U8.5 U9.2 U9.7 | length 305.8
  Top Layer w0.14: 41.85,47.925 J2.15
  Top Layer w0.2: -41.9,-48.85 -41.9,-47.474 -41.7,-47.274 v3(-41.7,-47.207) ; C6.1 -18.654,-24.921 v2(-18.5,-25.075) ; U6.11 -3.086,-16.275 -3.086,-16.76 -2.325,-17.522 -2.325,-18.491 C7.1 -1.525,-19.337 v2(-2.225,-20.037) ; v2(2.2,20) 1.5,19.3 C2.1 2.3,18.454 2.3,17.485 3.062,16.723 3.062,16.238 U2.11 ; v3(41.676,47.17) 41.676,47.252 41.85,47.426 41.85,47.925
  Top Layer w0.3: C5.1 -4.427,28.927 -4.354,29 v2(-4.3,29) -4.287,28.988 -3.407,28.988 U4.5 ; U6.11 U6.17@-3.1,-14.662 ; C1.1 -2.723,16.85 -2.723,17.123 -2.6,17.246 v2(-2.6,17.3) ; C9.1 -1.598,-28.937 v2(-0.425,-28.937) ; U6.14 U6.17@-3.1,-14.662 ; U6.15 U6.17@-3.1,-14.012 ; U6.16 -2.45,-13.362 U6.17@-3.1,-14.012 ; U3.A1 -0.2,0.2 M1.1@0,0 ; C3.2 -0.18,14.35 0.01,14.54 0.01,14.56 0.725,15.275 U2.13 2.425,15.275 U2.17@3.075,14.625 ; C8.2 0.155,-14.387 -0.035,-14.577 -0.035,-14.597 -0.75,-15.312 U6.13 -2.45,-15.312 U6.17@-3.1,-14.662 ; U7.A1 M1.1@0.175,-0.237 ; v2(0.4,28.9) 1.573,28.9 C4.1 ; U2.16 2.425,13.325 U2.17@3.075,13.975 ; U2.15 U2.17@3.075,13.975 ; U2.14 U2.17@3.075,14.625 ; U2.11 U2.17@3.075,14.625 ; U8.5 3.383,-29.024 4.263,-29.024 v2(4.275,-29.037) 4.33,-29.037 4.403,-28.964 C10.1 ; C11.1 4.375,-16.827 4.375,-17.275 v2(4.4,-17.3) ; U6.17@-3.1,-14.662 U6.17 U6.17@-3.1,-14.012 ; U2.17@3.075,13.975 U2.17 U2.17@3.075,14.625
  Top Layer w0.5: M1.1@0,0 4,-4 U9.2 U9.7
  Top Layer w0.75: M1.1@-4.4,-10.437 -3.975,-10.437 -3.75,-10.662 U6.3 -3.75,-14.012 U6.17 ; U2.17 3.725,13.975 U2.3 3.725,10.625 3.95,10.4 M1.1@4.375,10.4
  Top Layer w1: U5.7 U5.2 -17.225,-18.425 v1(-17.2,-18.4) ; U6.8 U6.7 U6.6 U6.5 U6.4 -4.4,-10.437 -4.4,-4.412 M1.1@-0.025,-0.037 ; U1.7 U1.2 -4,4 M1.1@-0.2,0.2 ; M1.1@0,0 4.375,4.375 4.375,10.4 U2.4 U2.5 U2.6 U2.7 U2.8
  Bottom Layer w0.14: v1(-7.6,17.2) -7.55,17.25 -2.65,17.25 v2(-2.6,17.3) ; -2.225,-21.637 v2(-2.225,-20.037) ; v2(2.2,20) 2.2,21.6 ; v2(4.4,-17.3) 6.137,-17.3 6.238,-17.2 7.539,-17.2 v1@7.575,-17.237
  Bottom Layer w0.2: v1(-7.6,18.4) -5.9,20.1 -5.9,21.4 ; -5.825,-21.237 -5.825,-5.837 -0.025,-0.037 ; M1.1@0,0 5.8,5.8 5.8,21.2 ; v1(7.6,-18.4) 9,-19.8 9,-21.32
  Bottom Layer w0.5: -21.785,21.385 -20.7,20.3 -19.1,20.3 -18.4,19.6 v1(-18.4,18.4) ; v1@-18.45,18.35 -18.05,17.95 ; v1@18.025,-17.987 v1@18.425,-18.387 ; v1@18.375,-18.437 18.375,-19.637 19.075,-20.337 20.675,-20.337 21.76,-21.421
  Bottom Layer w1: -18.05,17.95 -0.1,0 M1.1@0,0 ; -0.025,-0.037 0.075,-0.037 v1@18.025,-17.987
  Bottom Layer w4: M6.1@-28,20 M6.1@-28,36 ; M6.1@28,-36 M6.1@28,-20
  other v1: -18.4,-18.4 -16,-18.4 -14.8,-18.4 -14,-18.4 -13.2,-18.4 -12.4,-18.4 -11.6,-18.4 -10.8,-18.4 -10,-18.4 -9.2,-18.4 -8.4,-18.4 -7.6,-18.4 8.4,-18.4 9.2,-18.4 10,-18.4 10.8,-18.4 11.6,-18.4 12.4,-18.4 13.2,-18.4 14,-18.4 14.8,-18.4 16.012,-18.394 17.212,-18.394 18.412,-18.394 -17.8,-18 -16.6,-18 -15.4,-18 15.412,-17.994 16.612,-17.994 17.812,-17.994 -14.4,-17.8 -13.6,-17.8 -12.8,-17.8 -12,-17.8 -11.2,-17.8 -10.4,-17.8 -9.6,-17.8 -8.8,-17.8 -8,-17.8 -7.2,-17.8 7.2,-17.8 8,-17.8 8.8,-17.8 9.6,-17.8 10.4,-17.8 11.2,-17.8 12,-17.8 12.8,-17.8 13.6,-17.8 14.4,-17.8 -18.4,-17.6 -17.2,-17.6 -16,-17.6 16.012,-17.594 17.212,-17.594 18.412,-17.594 -17.8,-17.2 -16.6,-17.2 -15.4,-17.2 -14.8,-17.2 -14,-17.2 -13.2,-17.2 -12.4,-17.2 -11.6,-17.2 -10.8,-17.2 -10,-17.2 -9.2,-17.2 -8.4,-17.2 -7.6,-17.2 7.6,-17.2 8.4,-17.2 9.2,-17.2 10,-17.2 10.8,-17.2 11.6,-17.2 12.4,-17.2 13.2,-17.2 14,-17.2 14.8,-17.2 15.412,-17.194 16.612,-17.194 17.812,-17.194 -18.4,-16.8 -17.2,-16.8 -16,-16.8 16.012,-16.794 17.212,-16.794 18.412,-16.794 -14.4,-16.6 -13.6,-16.6 -12.8,-16.6 -12,-16.6 -11.2,-16.6 -10.4,-16.6 -9.6,-16.6 -8.8,-16.6 -8,-16.6 -7.2,-16.6 7.2,-16.6 8,-16.6 8.8,-16.6 9.6,-16.6 10.4,-16.6 11.2,-16.6 12,-16.6 12.8,-16.6 13.6,-16.6 14.4,-16.6 -17.8,-16.4 -16.6,-16.4 -15.4,-16.4 15.412,-16.394 16.612,-16.394 17.812,-16.394 -18.4,-16 -17.2,-16 -16,-16 -14.8,-16 -14,-16 -13.2,-16 -12.4,-16 -11.6,-16 -10.8,-16 -10,-16 -9.2,-16 -8.4,-16 -7.6,-16 7.6,-16 8.4,-16 9.2,-16 10,-16 10.8,-16 11.6,-16 12.4,-16 13.2,-16 14,-16 14.8,-16 16.012,-15.994 17.212,-15.994 18.412,-15.994 -17.8,-15.6 -16.6,-15.6 -15.4,-15.6 15.412,-15.594 16.612,-15.594 17.812,-15.594 -14.4,-15.4 -13.6,-15.4 -12.8,-15.4 -12,-15.4 -11.2,-15.4 -10.4,-15.4 -9.6,-15.4 -8.8,-15.4 -8,-15.4 -7.2,-15.4 7.2,-15.4 8,-15.4 8.8,-15.4 9.6,-15.4 10.4,-15.4 11.2,-15.4 12,-15.4 12.8,-15.4 13.6,-15.4 14.4,-15.4 -18.4,-15.2 -17.2,-15.2 -16,-15.2 16.012,-15.194 17.212,-15.194 18.412,-15.194 -17.8,-14.8 -16.6,-14.8 -15.4,-14.8 15.412,-14.794 16.612,-14.794 17.812,-14.794 -18.4,-14.4 -17.2,-14.4 -16,-14.4 16.012,-14.394 17.212,-14.394 18.412,-14.394 -17.8,-14 -16.6,-14 -15.4,-14 15.412,-13.994 16.612,-13.994 17.812,-13.994 -18.4,-13.6 -17.2,-13.6 -16,-13.6 16.012,-13.594 17.212,-13.594 18.412,-13.594 -17.8,-13.2 -16.6,-13.2 -15.4,-13.2 15.412,-13.194 16.612,-13.194 17.812,-13.194 -18.4,-12.8 -17.2,-12.8 -16,-12.8 16.012,-12.794 17.212,-12.794 18.412,-12.794 -17.8,-12.4 -16.6,-12.4 -15.4,-12.4 15.412,-12.394 16.612,-12.394 17.812,-12.394 -18.4,-12 -17.2,-12 -16,-12 16.012,-11.994 17.212,-11.994 18.412,-11.994 -17.8,-11.6 -16.6,-11.6 -15.4,-11.6 15.412,-11.594 16.612,-11.594 17.812,-11.594 -18.4,-11.2 -17.2,-11.2 -16,-11.2 16.012,-11.194 17.212,-11.194 18.412,-11.194 -17.8,-10.8 -16.6,-10.8 -15.4,-10.8 15.412,-10.794 16.612,-10.794 17.812,-10.794 -18.4,-10.4 -17.2,-10.4 -16,-10.4 16.012,-10.394 17.212,-10.394 18.412,-10.394 -17.8,-10 -16.6,-10 -15.4,-10 15.412,-9.994 16.612,-9.994 17.812,-9.994 -18.4,-9.6 -17.2,-9.6 -16,-9.6 16.012,-9.594 17.212,-9.594 18.412,-9.594 -17.8,-9.2 -16.6,-9.2 -15.4,-9.2 15.412,-9.194 16.612,-9.194 17.812,-9.194 -18.4,-8.8 -17.2,-8.8 -16,-8.8 16.012,-8.794 17.212,-8.794 18.412,-8.794 -17.8,-8.4 -16.6,-8.4 -15.4,-8.4 15.412,-8.394 16.612,-8.394 17.812,-8.394 -18.4,-8 -17.2,-8 -16,-8 16.012,-7.994 17.212,-7.994 18.412,-7.994 -17.8,-7.6 -16.6,-7.6 -15.4,-7.6 15.412,-7.594 16.612,-7.594 17.812,-7.594 -18.4,-7.2 -17.2,-7.2 -16,-7.2 16.012,-7.194 17.212,-7.194 18.412,-7.194 -17.8,-6.8 -16.6,-6.8 -15.4,-6.8 15.412,-6.794 16.612,-6.794 17.812,-6.794 -18.4,-6.4 -17.2,-6.4 -16,-6.4 16.012,-6.394 17.212,-6.394 18.412,-6.394 -17.8,-6 -16.6,-6 -15.4,-6 15.412,-5.994 16.612,-5.994 17.812,-5.994 -18.4,-5.6 -17.2,-5.6 -16,-5.6 16.012,-5.594 17.212,-5.594 18.412,-5.594 -17.8,-5.2 -16.6,-5.2 -15.4,-5.2 15.412,-5.194 16.612,-5.194 17.812,-5.194 -18.4,-4.8 -17.2,-4.8 -16,-4.8 16.012,-4.794 17.212,-4.794 18.412,-4.794 -17.8,-4.4 -16.6,-4.4 -15.4,-4.4 15.412,-4.394 16.612,-4.394 17.812,-4.394 -18.4,-4 -17.2,-4 -16,-4 16.012,-3.994 17.212,-3.994 18.412,-3.994 -17.8,-3.6 -16.6,-3.6 -15.4,-3.6 15.412,-3.594 16.612,-3.594 17.812,-3.594 -18.4,-3.2 -17.2,-3.2 -16,-3.2 16.012,-3.194 17.212,-3.194 18.412,-3.194 -17.8,-2.8 -16.6,-2.8 -15.4,-2.8 15.412,-2.794 16.612,-2.794 17.812,-2.794 -18.4,-2.4 -17.2,-2.4 -16,-2.4 16.012,-2.394 17.212,-2.394 18.412,-2.394 -17.8,-2 -16.6,-2 -15.4,-2 15.412,-1.994 16.612,-1.994 17.812,-1.994 -18.4,-1.6 -17.2,-1.6 -16,-1.6 16.012,-1.594 17.212,-1.594 18.412,-1.594 -17.8,-1.2 -16.6,-1.2 -15.4,-1.2 15.412,-1.194 16.612,-1.194 17.812,-1.194 -18.4,-0.8 -17.2,-0.8 -16,-0.8 16.012,-0.794 17.212,-0.794 18.412,-0.794 -17.8,-0.4 -16.6,-0.4 -15.4,-0.4 15.412,-0.394 16.612,-0.394 17.812,-0.394 -18.4,0 -17.2,0 -16,0 16.012,0.006 17.212,0.006 18.412,0.006 -17.8,0.4 -16.6,0.4 -15.4,0.4 15.412,0.406 16.612,0.406 17.812,0.406 -18.4,0.8 -17.2,0.8 -16,0.8 16.012,0.806 17.212,0.806 18.412,0.806 -17.8,1.2 -16.6,1.2 -15.4,1.2 15.412,1.206 16.612,1.206 17.812,1.206 -18.4,1.6 -17.2,1.6 -16,1.6 16.012,1.606 17.212,1.606 18.412,1.606 -17.8,2 -16.6,2 -15.4,2 15.412,2.006 16.612,2.006 17.812,2.006 -18.4,2.4 -17.2,2.4 -16,2.4 16.012,2.406 17.212,2.406 18.412,2.406 -17.8,2.8 -16.6,2.8 -15.4,2.8 15.412,2.806 16.612,2.806 17.812,2.806 -18.4,3.2 -17.2,3.2 -16,3.2 16.012,3.206 17.212,3.206 18.412,3.206 -17.8,3.6 -16.6,3.6 -15.4,3.6 15.412,3.606 16.612,3.606 17.812,3.606 -18.4,4 -17.2,4 -16,4 16.012,4.006 17.212,4.006 18.412,4.006 -17.8,4.4 -16.6,4.4 -15.4,4.4 15.412,4.406 16.612,4.406 17.812,4.406 -18.4,4.8 -17.2,4.8 -16,4.8 16.012,4.806 17.212,4.806 18.412,4.806 -17.8,5.2 -16.6,5.2 -15.4,5.2 15.412,5.206 16.612,5.206 17.812,5.206 -18.4,5.6 -17.2,5.6 -16,5.6 16.012,5.606 17.212,5.606 18.412,5.606 -17.8,6 -16.6,6 -15.4,6 15.412,6.006 16.612,6.006 17.812,6.006 -18.4,6.4 -17.2,6.4 -16,6.4 16.012,6.406 17.212,6.406 18.412,6.406 -17.8,6.8 -16.6,6.8 -15.4,6.8 15.412,6.806 16.612,6.806 17.812,6.806 -18.4,7.2 -17.2,7.2 -16,7.2 16.012,7.206 17.212,7.206 18.412,7.206 -17.8,7.6 -16.6,7.6 -15.4,7.6 15.412,7.606 16.612,7.606 17.812,7.606 -18.4,8 -17.2,8 -16,8 16.012,8.006 17.212,8.006 18.412,8.006 -17.8,8.4 -16.6,8.4 -15.4,8.4 15.412,8.406 16.612,8.406 17.812,8.406 -18.4,8.8 -17.2,8.8 -16,8.8 16.012,8.806 17.212,8.806 18.412,8.806 -17.8,9.2 -16.6,9.2 -15.4,9.2 15.412,9.206 16.612,9.206 17.812,9.206 -18.4,9.6 -17.2,9.6 -16,9.6 16.012,9.606 17.212,9.606 18.412,9.606 -17.8,10 -16.6,10 -15.4,10 15.412,10.006 16.612,10.006 17.812,10.006 -18.4,10.4 -17.2,10.4 -16,10.4 16.012,10.406 17.212,10.406 18.412,10.406 -17.8,10.8 -16.6,10.8 -15.4,10.8 15.412,10.806 16.612,10.806 17.812,10.806 -18.4,11.2 -17.2,11.2 -16,11.2 16.012,11.206 17.212,11.206 18.412,11.206 -17.8,11.6 -16.6,11.6 -15.4,11.6 15.412,11.606 16.612,11.606 17.812,11.606 -18.4,12 -17.2,12 -16,12 16.012,12.006 17.212,12.006 18.412,12.006 -17.8,12.4 -16.6,12.4 -15.4,12.4 15.412,12.406 16.612,12.406 17.812,12.406 -18.4,12.8 -17.2,12.8 -16,12.8 16.012,12.806 17.212,12.806 18.412,12.806 -17.8,13.2 -16.6,13.2 -15.4,13.2 15.412,13.206 16.612,13.206 17.812,13.206 -18.4,13.6 -17.2,13.6 -16,13.6 16.012,13.606 17.212,13.606 18.412,13.606 -17.8,14 -16.6,14 -15.4,14 15.412,14.006 16.612,14.006 17.812,14.006 -18.4,14.4 -17.2,14.4 -16,14.4 16.012,14.406 17.212,14.406 18.412,14.406 -17.8,14.8 -16.6,14.8 -15.4,14.8 15.412,14.806 16.612,14.806 17.812,14.806 -18.4,15.2 -17.2,15.2 -16,15.2 16.012,15.206 17.212,15.206 18.412,15.206 -14.4,15.4 -13.6,15.4 -12.8,15.4 -12,15.4 -11.2,15.4 -10.4,15.4 -9.6,15.4 -8.8,15.4 -8,15.4 -7.2,15.4 7.2,15.4 8,15.4 8.8,15.4 9.6,15.4 10.4,15.4 11.2,15.4 12,15.4 12.8,15.4 13.6,15.4 14.4,15.4 -17.8,15.6 -16.6,15.6 -15.4,15.6 15.412,15.606 16.612,15.606 17.812,15.606 -18.4,16 -17.2,16 -16,16 -14.8,16 -14,16 -13.2,16 -12.4,16 -11.6,16 -10.8,16 -10,16 -9.2,16 -8.4,16 -7.6,16 7.6,16 8.4,16 9.2,16 10,16 10.8,16 11.6,16 12.4,16 13.2,16 14,16 14.8,16 16.012,16.006 17.212,16.006 18.412,16.006 -17.8,16.4 -16.6,16.4 -15.4,16.4 15.412,16.406 16.612,16.406 17.812,16.406 -14.4,16.6 -13.6,16.6 -12.8,16.6 -12,16.6 -11.2,16.6 -10.4,16.6 -9.6,16.6 -8.8,16.6 -8,16.6 -7.2,16.6 7.2,16.6 8,16.6 8.8,16.6 9.6,16.6 10.4,16.6 11.2,16.6 12,16.6 12.8,16.6 13.6,16.6 14.4,16.6 -18.4,16.8 -17.2,16.8 -16,16.8 16.012,16.806 17.212,16.806 18.412,16.806 -17.8,17.2 -16.6,17.2 -15.4,17.2 -14.8,17.2 -14,17.2 -13.2,17.2 -12.4,17.2 -11.6,17.2 -10.8,17.2 -10,17.2 -9.2,17.2 -8.4,17.2 7.6,17.2 8.4,17.2 9.2,17.2 10,17.2 10.8,17.2 11.6,17.2 12.4,17.2 13.2,17.2 14,17.2 14.8,17.2 15.412,17.206 16.612,17.206 17.812,17.206 -18.4,17.6 -17.2,17.6 -16,17.6 16.012,17.606 17.212,17.606 18.412,17.606 -14.4,17.8 -13.6,17.8 -12.8,17.8 -12,17.8 -11.2,17.8 -10.4,17.8 -9.6,17.8 -8.8,17.8 -8,17.8 -7.2,17.8 7.2,17.8 8,17.8 8.8,17.8 9.6,17.8 10.4,17.8 11.2,17.8 12,17.8 12.8,17.8 13.6,17.8 14.4,17.8 -17.8,18 -16.6,18 -15.4,18 15.412,18.006 16.612,18.006 17.812,18.006 -17.2,18.4 -16,18.4 -14.8,18.4 -14,18.4 -13.2,18.4 -12.4,18.4 -11.6,18.4 -10.8,18.4 -10,18.4 -9.2,18.4 -8.4,18.4 7.6,18.4 8.4,18.4 9.2,18.4 10,18.4 10.8,18.4 11.6,18.4 12.4,18.4 13.2,18.4 14,18.4 14.8,18.4 16.012,18.406 17.212,18.406 18.412,18.406
NetC5_2: C5.2 J1.6 J1.7 J1.8 U4.8 | length 110.9
  Top Layer w0.2: C5.2 -5.576,27.049 -5.552,27.025 U4.8
  Top Layer w0.5: -39.4,-48.9 -39.4,24.7 -39.1,25 -36.7,27.4 -5.927,27.4 C5.2
NetC10_2: C10.2 J2.6 J2.7 J2.8 U8.8 | length 111.3
  Top Layer w0.2: U8.8 5.527,-27.062 5.551,-27.086 C10.2
  Top Layer w0.5: C10.2 5.902,-27.437 37.288,-27.437 39.45,-25.275 39.45,-25 J2.7
NetJ1_1: J1.1 R2.1 U1.1 U2.2 U3.B3 | length 136.3
  Top Layer w0.14: -37.65,-48.9 -37.65,24.344 -36.994,25 -35.994,26 -26.2,26 -25.2,25 -20.583,20.382 -6.891,20.382 -6.28,20.993 -6.28,21.093 -6,21.373 R2.1 R2.1@-5.627,21.1 ; U1.1@-5,11.828 -5.128,11.828 -5.62,12.32 -5.62,21.093 R2.1@-5.627,21.1 ; U3.B3 -1.247,12.241 -1.286,12.281 -1.374,12.403 -1.4,12.44 -1.4,12.485 -1.4,12.618 ; v2(-0.796,12.726) -1.292,12.726 -1.4,12.618 ; v2(0.396,12.448) 0.396,12.404 1.1,11.7 2.675,11.7 3.075,12.1 U2.2 ; R2.1@-5.627,21.1 -4.4,21.1 -0.5,17.2 -0.5,15.7 -1.4,14.8 -1.4,12.618
  Bottom Layer w0.1: v2(-0.796,12.726) -0.796,12.71 -0.486,12.4 0.347,12.4 v2(0.396,12.448)
NetJ1_3: J1.3 R1.1 U1.6 U2.1 U3.A3 | length 134
  Top Layer w0.14: -38.25,-48.9 -38.25,24.35 -37.6,25 -36.2,26.4 -25.982,26.4 -24.582,25 -21.182,21.6 -7.827,21.6 -7.32,21.093 -7.32,21.553 -7.22,21.653 -6.915,21.958 -5.12,21.958 -4.862,21.7 v2(-4.8,21.7) ; U1.6 -5,14.94 -5.13,15.07 -5.218,15.07 -5.3,15.152 -5.3,19.4 v2(-4.4,20.3) -4.365,20.265 -4.065,20.265 -0.9,17.1 -0.9,15.8 -1.9,14.8 v2(-1.9,13.2) -1.9,12.5 -1.405,11.881 -1.364,11.84 -1.316,11.835 U3.A3 ; v2(0.6,13.1) 1.325,12.375 U2.1
  Bottom Layer w0.1: v2(-4.8,21.7) -4.8,21.246 -4.9,21.146 -4.9,20.8 v2(-4.4,20.3) ; v2(-1.9,13.2) -1.85,13.15 0.55,13.15 v2(0.6,13.1)
NetJ1_5: J1.5 R5.1 U3.A2 | length 124.3
  Top Layer w0.14: -38.85,-48.9 -38.85,24.316 -38.166,25 -36.366,26.8 -25.8,26.8 -24,25 -21.386,22.386 -4.686,22.386 -3.969,21.669 -3.969,21.369 v2(-3.9,21.3) ; v2(-3.9,19.5) -1.527,17.127 R5.1 -1.527,15.673 -2.4,14.8 -2.4,12.4 -1.5,11.5 -0.685,11.5 -0.605,11.581 U3.A2
  Bottom Layer w0.1: v2(-3.9,19.5) v2(-3.9,21.3)
NetJ1_9: J1.9 U4.7 | length 112
  Top Layer w0.14: -40.05,-48.9 -40.05,25 -40.05,25.15 -37.2,28 -4.94,28 -4.615,27.675 U4.7
NetJ1_11: J1.11 R3.1 U2.10 | length 136.1
  Top Layer w0.14: -40.65,-48.9 -40.65,25 -40.65,25.25 -37.4,28.5 -24.3,28.5 -22.9,29.9 2.6,29.9 5.5,27 5.5,25 5.5,18.842 5.258,18.6 4.127,18.6 3.264,17.736 R3.1 ; R3.1@3.3,17.7 3.4,17.7 3.725,17.375 U2.10
NetJ1_13: J1.13 R4.1 U2.9 | length 136.4
  Top Layer w0.14: -41.25,-48.9 -41.25,25 -41.25,25.35 -37.6,29 -24.5,29 -23.1,30.4 2.7,30.4 5.8,27.3 5.8,25 5.8,18.646 5.18,18.026 5.18,17.926 4.9,17.646 R4.1 ; U2.9 4.375,17.175 R4.1@4.823,17.623
NetJ2_1: J2.1 R7.1 U5.1 U6.2 U7.B3 U9.4 U9.6 | length 161.8
  Top Layer w0.14: U5.1 -13.72,-22.3 v2(-6.425,-22.3) ; v2(-4.975,-22.3) -4.962,-22.313 -3.762,-22.313 v2(-3.75,-22.325) ; U6.2 -3.1,-12.137 -2.7,-11.737 -1.125,-11.737 -0.42,-12.441 v2(-0.42,-12.485) ; v2(-2.775,-21.7) -2.15,-21.075 v2(-1.375,-21.075) ; v2(0.35,-20.375) 1.127,-20.375 2.37,-19.132 ; v2(0.771,-12.763) 1.267,-12.763 1.375,-12.655 ; U7.B3 1.222,-12.278 1.262,-12.318 1.349,-12.44 1.375,-12.477 1.375,-12.522 1.375,-12.655 ; U9.4 3.27,-13.725 3.27,-14 3.263,-14.007 3.263,-14.737 2.8,-15.2 2.8,-16.7 4.822,-18.722 ; U9.6 4.65,-13.845 4.822,-14.017 4.822,-18.722 ; R7.1@5.602,-21.137 4.375,-21.137 4.265,-21.027 ; R7.1@5.625,-21.159 R7.1 5.975,-21.41 6.255,-21.13 6.255,-21.03 6.866,-20.419 19.294,-20.419 24.912,-26.037 36.588,-26.037 37.625,-25 37.625,48.85 ; 1.375,-12.655 1.375,-14.837 0.475,-15.737 0.475,-17.237 2.37,-19.132 ; 2.37,-19.132 4.265,-21.027 ; 4.265,-21.027 4.822,-20.47 4.822,-18.722
  Bottom Layer w0.1: v2(-0.42,-12.485) -0.372,-12.437 0.461,-12.437 0.771,-12.747 v2(0.771,-12.763)
  Bottom Layer w0.14: v2(-6.425,-22.3) v2(-4.975,-22.3) ; v2(-3.75,-22.325) -3.194,-21.769 -2.844,-21.769 v2(-2.775,-21.7) ; v2(-1.375,-21.075) -0.675,-20.375 v2(0.35,-20.375)
NetJ2_2: J2.2 R11.1 U9.3 | length 119.9
  Top Layer w0.14: v2(2.525,-17.5) 2.475,-17.45 2.475,-15.125 2.875,-14.725 2.875,-12.318 3.138,-12.055 3.15,-12.055 3.35,-11.855 U9.3 ; R11.1 3,-22 3.28,-22.28 16.48,-22.28 16.6,-22.4 19.475,-22.4 v2(22.875,-25.8) ; v2(24.2,-24.7) 25.2,-25.7 36.35,-25.7 37.15,-24.9 37.15,40.775 v3(37.025,40.9)
  Bottom Layer w0.14: v2(2.525,-17.5) 2.525,-19.925 2.55,-19.95 ; v2(22.875,-25.8) 23.906,-24.769 24.131,-24.769 v2(24.2,-24.7) ; v3(37.025,40.9) 37.675,41.55 37.675,47.501 37.95,47.776 J2.2
NetJ2_3: J2.3 R6.1 U5.6 U6.1 U7.A3 U9.1 | length 161
  Top Layer w0.14: U5.6 -15.7,-23.2 v2(-6.4,-23.2) ; v2(-5.025,-23.2) -5,-23.225 -2.675,-23.225 v2(-2.65,-23.25) ; U6.1 -1.35,-12.412 v2(-0.625,-13.137) ; v2(-0.55,-23.1) -0.207,-22.757 v2(4.592,-22.757) ; U7.A3 1.291,-11.872 1.34,-11.877 1.38,-11.917 1.875,-12.537 v2(1.875,-13.237) 1.875,-14.837 0.875,-15.837 0.875,-17.137 4.04,-20.301 4.337,-20.301 v2(4.355,-20.32) ; U9.1 4.65,-11.855 4.85,-12.055 4.862,-12.055 5.17,-12.363 v2(5.17,-20.737) ; v2(8.3,-20.875) 8.21,-20.875 7.725,-21.36 7.525,-21.36 7.802,-21.637 20.012,-21.637 23.375,-25 24.812,-26.437 36.763,-26.437 38.25,-24.95 J2.3
  Bottom Layer w0.1: v2(-0.625,-13.137) -0.575,-13.187 1.825,-13.187 v2(1.875,-13.237)
  Bottom Layer w0.14: v2(-6.4,-23.2) v2(-5.025,-23.2) ; v2(-2.65,-23.25) -2.553,-23.25 -2.403,-23.1 v2(-0.55,-23.1) ; v2(4.355,-20.32) 4.37,-20.334 4.823,-20.334 5.17,-20.682 v2@5.17,-20.722 ; v2(4.592,-22.757) 5.17,-22.179 v2(5.17,-20.737) v2@5.17,-20.722 ; v2@5.143,-20.722 v2@5.17,-20.722 ; v2(8.3,-20.875) 5.406,-20.875 5.253,-20.722 v2@5.17,-20.722
NetJ2_5: J2.5 R10.1 U7.A2 | length 124.6
  Top Layer w0.14: U7.A2 0.58,-11.617 0.661,-11.537 1.475,-11.537 2.307,-12.369 2.307,-14.905 1.502,-15.71 R10.1 1.502,-17.164 v2(3.875,-19.537) ; v2(3.875,-21.337) 3.944,-21.406 3.944,-21.706 4.264,-22.025 19.85,-22.025 22.825,-25 24.662,-26.837 36.988,-26.837 38.85,-24.975 J2.5
  Bottom Layer w0.14: v2(3.875,-21.337) v2(3.875,-19.537)
NetJ2_9: J2.9 U8.7 | length 112.2
  Top Layer w0.14: U8.7 4.59,-27.712 4.915,-28.037 37.513,-28.037 40.05,-25.5 40.05,-25 J2.9
NetJ2_11: J2.11 R8.1 U6.10 | length 136.2
  Top Layer w0.14: U6.10 -3.75,-17.412 -3.425,-17.737 R8.1@-3.325,-17.737 ; R8.1 -3.288,-17.773 -4.152,-18.637 -5.283,-18.637 -5.525,-18.879 -5.525,-25.037 -5.525,-27.037 -2.625,-29.937 22.875,-29.937 24.275,-28.537 37.538,-28.537 40.65,-25.425 40.65,-25 J2.11
NetJ2_13: J2.13 R9.1 U6.9 | length 136.4
  Top Layer w0.14: R9.1@-4.848,-17.66 -4.4,-17.212 U6.9 ; R9.1 -4.925,-17.683 -5.205,-17.963 -5.205,-18.063 -5.825,-18.683 -5.825,-25.037 -5.825,-27.337 -2.725,-30.437 23.075,-30.437 24.475,-29.037 37.688,-29.037 41.25,-25.475 41.25,-25 J2.13
pads on no net: J1.2 J1.4 J1.10 J1.12 J1.14 J2.4 J2.10 J2.12 J2.14 U1.3 U1.4 U4.2 U4.3 U4.4 U4.6 U4.9 U5.3 U5.4 U8.2 U8.3 U8.4 U8.6 U8.9
copper on no net:
  other v2: 2.55,-19.95

## Polygon pours and split planes (outlines as drawn)
no net on Layer0 "Default Coverlay 1 Top" (split plane): -43.505,-48.421 -43.438,-48.76 -43.305,-49.08 -43.113,-49.368 -42.868,-49.613 -42.58,-49.805 -42.26,-49.938 -41.921,-50.005 -37.579,-50.005 -37.24,-49.938 -36.92,-49.805 -36.632,-49.613 -36.387,-49.368 -36.195,-49.08 -36.062,-48.76 -35.995,-48.421 -35.995,-43.505 43.505,-43.505 43.505,48.421 43.438,48.76 43.305,49.08 43.113,49.368 42.868,49.613 42.58,49.805 42.26,49.938 41.921,50.005 37.579,50.005 37.24,49.938 36.92,49.805 36.632,49.613 36.387,49.368 36.195,49.08 36.062,48.76 35.995,48.421 35.995,43.505 -43.505,43.505 -43.505,31.5
no net on Layer0 "Default Coverlay 1 Bottom" (split plane): -43.505,-48.421 -43.438,-48.76 -43.305,-49.08 -43.113,-49.368 -42.868,-49.613 -42.58,-49.805 -42.26,-49.938 -41.921,-50.005 -37.579,-50.005 -37.24,-49.938 -36.92,-49.805 -36.632,-49.613 -36.387,-49.368 -36.195,-49.08 -36.062,-48.76 -35.995,-48.421 -35.995,-43.505 43.505,-43.505 43.505,48.421 43.438,48.76 43.305,49.08 43.113,49.368 42.868,49.613 42.58,49.805 42.26,49.938 41.921,50.005 37.579,50.005 37.24,49.938 36.92,49.805 36.632,49.613 36.387,49.368 36.195,49.08 36.062,48.76 35.995,48.421 35.995,43.505 -43.505,43.505 -43.505,31.5
GND on Bottom Layer "GND_L02_P003" (solid, pour order 3): 41.95,47.463 37.525,47.463 37.525,-24.087 35.575,-25.637 27.337,-25.637 22.937,-21.237 -19.375,-21.237 -19.375,-30.837 36.675,-30.837 41.95,-25.6
GND on Bottom Layer "GND_L02_P002" (solid, pour order 2): -41.95,-47.5 -37.7,-47.5 -37.7,24.05 -36,25.6 -26.4,25.6 -22,21.2 6.2,21.2 6.2,30.8 -36.7,30.8 -41.95,25.564

## Silkscreen, mask and mechanical layers (free items; w line width, h text height)
Mechanical 1:
  lines w0.01: -43.5,-48.247 ccw(c-41.747,-48.247) -41.747,-50 -38.5,-50 -37.753,-50 ccw(c-37.753,-48.247) -36,-48.247 -36,-45.5 -36,-35 -36,24.5 cw(c-35.5,24.5) -35.5,25 ; -43.5,-48.242 -43.5,25 ; 27,-25 35,-25 ; -43.5,25 -43.5,41.747 cw(c-41.747,41.747) -41.747,43.5 36,43.5 33.247,43.5 cw(c33.247,41.747) 35,41.747 35,25 ; -43.5,25 -35.5,25 ; -35.5,25 cw(c-35.5,24.5) -35,24.5 -35,-25 ; -35.5,25 35,25 ; -35.5,25 -35.5,25 ; -35,-25 ccw(c-35,-25) -35,-25 ; -35,-25 -35,-41.747 ccw(c-33.247,-41.747) -33.247,-43.5 -36,-43.5 41.747,-43.5 ccw(c41.747,-41.747) 43.5,-41.747 43.5,-25 ; -35,-25 -35,-25 ; -35,-25 35.5,-25 ; 35,-25 ccw(c35,-25) 35,-25 ; 35,25 35,-24.5 ccw(c35.5,-24.5) 35.5,-25 ; 35.5,-25 ccw(c35.5,-24.5) 36,-24.5 36,35 36,46.5 36,48.247 cw(c37.753,48.247) 37.753,50 40.5,50 41.747,50 cw(c41.747,48.247) 43.5,48.247 43.5,-25 ; 35.5,-25 43.5,-25 ; 43.5,-25 ccw(c43.5,-25) 43.5,-25 ; 43.5,-25 43.5,-25